# Altium PCB PCB1_ASCII.pcbdoc (part 2 of 2)
Units mm, origin at the board's own origin, x right, y up, seen from the top; angles counter-clockwise.
Board outline 100 x 24 mm, 4 copper layers (Top Layer 1, GND, VCC, Bottom Layer 1), stack 0.567 mm thick; 90 components, 59 nets, 339 pads, 337 vias.
Unrouted connection lines stored in the file: 82.
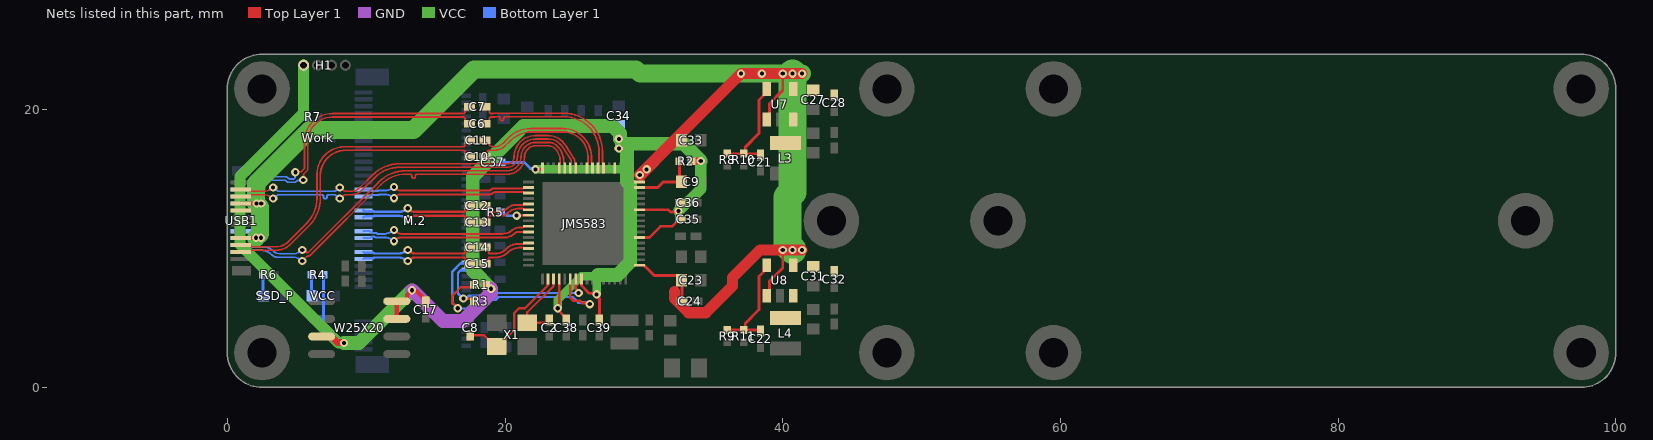
[diagram p4: the nets of this part, all layers, seen from the top]

## Via types
v1: diameter 0.6, hole 0.3, Top Layer 1 to Bottom Layer 1, 337 vias

## Nets (pads, with @x,y where several pads share a name; then routed paths per layer and width w, separated by ;. In a path a pad name is that pad's centre, name@x,y a point inside that pad or via, vN(x,y) a via of type N, cw(c..) or ccw(c..) an arc to the next point about the centre after c; other vN are vias at no path point) (continued)
N_P0_TX_N: C14.2 M.2.47 | length 8.1
  Top Layer 1 w0.172: v1(13,9.9) cw(c13,9.753) 13.104,9.857 13.188,9.773 ccw(c13.494,10.08) 13.494,9.646 17,9.646 ccw(c17,9.818) 17.122,9.697 ccw(c17,9.818) 17.172,9.818 17.172,9.832 cw(c17.377,9.832) 17.232,9.976 17.287,10.03 cw(c17.455,9.862) C14.2@17.455,10.1
  Bottom Layer 1 w0.172: M.2.47@9.8,9.75 ccw(c9.954,9.904) 9.954,9.686 10.501,9.686 cw(c10.501,9.618) 10.549,9.666 ccw(c10.597,9.714) 10.597,9.646 12.387,9.646 ccw(c12.387,10.366) 12.896,9.857 cw(c13,9.753) v1(13,9.9)
N_P0_TX_P: C15.2 M.2.49 | length 8.1
  Top Layer 1 w0.172: v1(13,9.1) ccw(c13,9.247) 13.104,9.143 13.188,9.227 cw(c13.494,8.92) 13.494,9.354 17,9.354 cw(c17,9.182) 17.122,9.303 cw(c17,9.182) 17.172,9.182 17.172,9.168 ccw(c17.377,9.168) 17.232,9.024 17.287,8.97 ccw(c17.455,9.138) C15.2@17.455,8.9
  Bottom Layer 1 w0.172: M.2.49@9.8,9.25 cw(c9.954,9.096) 9.954,9.314 10.501,9.314 ccw(c10.501,9.382) 10.549,9.334 cw(c10.597,9.286) 10.597,9.354 12.387,9.354 cw(c12.387,8.634) 12.896,9.143 ccw(c13,9.247) v1(13,9.1)
N_P1_TX_N: C12.2 M.2.35 | length 8.1
  Top Layer 1 w0.172: v1(13,12.9) cw(c13,12.753) 13.104,12.857 13.188,12.773 ccw(c13.494,13.08) 13.494,12.646 17,12.646 ccw(c17,12.818) 17.122,12.697 ccw(c17,12.818) 17.172,12.818 17.172,12.832 cw(c17.377,12.832) 17.232,12.976 17.287,13.03 cw(c17.455,12.862) C12.2@17.455,13.1
  Bottom Layer 1 w0.172: M.2.35@9.8,12.75 ccw(c9.954,12.904) 9.954,12.686 10.501,12.686 cw(c10.501,12.618) 10.549,12.666 ccw(c10.597,12.714) 10.597,12.646 12.387,12.646 ccw(c12.387,13.366) 12.896,12.857 cw(c13,12.753) v1(13,12.9)
N_P1_TX_P: C13.2 M.2.37 | length 8.1
  Top Layer 1 w0.172: v1(13,12.1) ccw(c13,12.247) 13.104,12.143 13.188,12.227 cw(c13.494,11.92) 13.494,12.354 17,12.354 cw(c17,12.182) 17.122,12.303 cw(c17,12.182) 17.172,12.182 17.172,12.168 ccw(c17.377,12.168) 17.232,12.024 17.287,11.97 ccw(c17.455,12.138) C13.2@17.455,11.9
  Bottom Layer 1 w0.172: M.2.37@9.8,12.25 cw(c9.954,12.096) 9.954,12.314 10.501,12.314 ccw(c10.501,12.382) 10.549,12.334 cw(c10.597,12.286) 10.597,12.354 12.387,12.354 cw(c12.387,11.634) 12.896,12.143 ccw(c13,12.247) v1(13,12.1)
NetC21_2: C21.2 R8.2 R10.1 U7.5 | length 7.8
  Top Layer 1 w0.2: R8.2@36,16.833 R10.1@37.2,16.833 ; C21.2@38.4,16.745 38.312,16.833 R10.1@37.2,16.833 ; U7.5@38.85,21.5 38.65,21.3 38.65,21.05 38.3,20.7 38.3,18.3 37.298,17.298 37.298,16.931 R10.1@37.2,16.833
NetC22_2: C22.2 R9.2 R11.1 U8.5 | length 7.8
  Top Layer 1 w0.2: R9.2@36,4.133 R11.1@37.2,4.133 ; C22.2@38.4,4.045 38.312,4.133 R11.1@37.2,4.133 ; U8.5@38.85,8.8 38.65,8.6 38.65,8.35 38.3,8 38.3,5.6 37.298,4.598 37.298,4.231 R11.1@37.2,4.133
NetL3_2: L3.2 U7.3
NetL4_2: L4.2 U8.3
NetR4_2: R4.2 VCC.2 | length 1.5
  Bottom Layer 1 w0.2: R4.2@6.067,8.1 6.067,6.637 VCC.2@6.101,6.603
NetR5_1: JMS583.39 R5.1 | length 2
  Top Layer 1 w0.2: v1(20.838,12.368) 21.269,12.399 cw(c21.283,12.2) 21.283,12.4 JMS583.39@21.7,12.4
  Bottom Layer 1 w0.2: R5.1@19.733,12.6 ccw(c20.292,13.159) 20.292,12.368 v1(20.838,12.368)
NetR6_2: R6.2 SSD_P.2 | length 1.5
  Bottom Layer 1 w0.2: R6.2@2.567,8.1 2.567,6.637 SSD_P.2@2.601,6.603
NetR7_2: R7.2 Work.1 | length 1.5
  Bottom Layer 1 w0.2: Work.1@5.698,17.996 5.716,18.014 R7.2@5.716,19.496
P0_RX_N: JMS583.41 M.2.41 | length 12.2
  Top Layer 1 w0.145: v1(12,11.333) cw(c12,11.224) 12.077,11.301 12.179,11.199 ccw(c12.502,11.522) 12.502,11.065 18.975,11.065 19.017,11.059 19.388,11.065 cw(c19.4,10.228) 19.4,11.065 19.49,11.065 19.6,11.065 19.803,11.065 19.805,11.065 ccw(c19.805,12.426) 20.299,11.158 ccw(c20.245,11.292) 20.344,11.186 20.378,11.218 cw(c21.21,10.285) 21.285,11.533 ccw(c21.285,11.648) 21.366,11.566 cw(c21.448,11.485) 21.448,11.6 JMS583.41@21.7,11.6
  Bottom Layer 1 w0.145: M.2.41@9.8,11.25 10.217,11.25 cw(c10.217,11.049) 10.359,11.191 ccw(c10.5,11.333) 10.5,11.132 10.657,11.132 cw(c10.657,11.017) 10.739,11.099 ccw(c10.82,11.18) 10.82,11.065 11.354,11.065 ccw(c11.354,11.87) 11.923,11.301 cw(c12,11.224) v1(12,11.333)
P0_RX_P: JMS583.42 M.2.43 | length 12.2
  Top Layer 1 w0.145: v1(12,10.533) ccw(c12,10.641) 12.077,10.564 12.179,10.666 cw(c12.502,10.343) 12.502,10.8 18.875,10.8 ; 18.876,10.8 ccw(c18.885,10.945) 18.879,10.8 19.007,10.795 ccw(c19.017,11.059) 19.02,10.794 19.021,10.794 19.391,10.8 cw(c19.4,10.228) 19.4,10.8 19.6,10.8 19.974,10.8 19.976,10.8 ccw(c19.976,11.824) 20.7,11.1 cw(c20.942,10.858) 20.942,11.2 JMS583.42@21.7,11.2
  Bottom Layer 1 w0.145: M.2.43@9.8,10.75 10.217,10.75 ccw(c10.217,10.951) 10.359,10.809 cw(c10.5,10.667) 10.5,10.867 10.547,10.867 cw(c10.547,10.752) 10.629,10.834 ccw(c10.71,10.915) 10.71,10.8 11.354,10.8 cw(c11.354,9.995) 11.923,10.564 ccw(c12,10.641) v1(12,10.533)
P0_TX_N: C14.1 JMS583.44 | length 3.6
  Top Layer 1 w0.145: C14.1@18.545,10.1 cw(c18.545,9.955) 18.648,10.058 18.714,9.991 cw(c18.501,9.778) 18.803,9.778 ccw(c18.948,9.778) 18.845,9.675 ccw(c18.948,9.777) 18.948,9.633 19.313,9.633 ccw(c19.313,10.66) 20.04,9.933 20.089,9.982 cw(c20.934,9.138) 20.934,10.332 21.285,10.332 ccw(c21.285,10.448) 21.366,10.366 cw(c21.448,10.285) 21.448,10.4 JMS583.44@21.7,10.4
P0_TX_P: C15.1 JMS583.45 | length 3.6
  Top Layer 1 w0.145: C15.1@18.545,8.9 ccw(c18.545,9.045) 18.648,8.942 18.714,9.009 ccw(c18.501,9.222) 18.803,9.222 cw(c18.948,9.222) 18.845,9.325 cw(c18.948,9.223) 18.948,9.367 19.368,9.367 ccw(c19.368,10.527) 20.188,9.707 20.199,9.717 cw(c21.043,8.873) 21.043,10.067 21.285,10.067 cw(c21.285,9.952) 21.366,10.034 ccw(c21.448,10.115) 21.448,10 JMS583.45@21.7,10
P1_RX_N: JMS583.34 M.2.29 | length 12.2
  Top Layer 1 w0.145: v1(12,14.433) cw(c12,14.324) 12.077,14.401 12.179,14.299 ccw(c12.502,14.622) 12.502,14.165 18.803,14.165 ccw(c18.803,14.451) 19.005,14.249 cw(c19.207,14.047) 19.207,14.332 21.285,14.332 ccw(c21.285,14.448) 21.366,14.366 cw(c21.448,14.285) 21.448,14.4 JMS583.34@21.7,14.4
  Bottom Layer 1 w0.145: M.2.29@9.8,14.25 10.217,14.25 cw(c10.217,14.049) 10.359,14.191 ccw(c10.5,14.333) 10.5,14.132 10.774,14.132 ccw(c10.774,14.188) 10.813,14.149 cw(c10.853,14.11) 10.853,14.165 11.354,14.165 ccw(c11.354,14.97) 11.923,14.401 cw(c12,14.324) v1(12,14.433)
P1_RX_P: JMS583.35 M.2.31 | length 12.2
  Top Layer 1 w0.145: v1(12,13.633) ccw(c12,13.741) 12.077,13.664 12.179,13.766 cw(c12.502,13.443) 12.502,13.9 18.913,13.9 ccw(c18.913,14.186) 19.115,13.984 cw(c19.317,13.782) 19.317,14.067 21.285,14.067 cw(c21.285,13.952) 21.366,14.034 ccw(c21.448,14.115) 21.448,14 JMS583.35@21.7,14
  Bottom Layer 1 w0.145: M.2.31@9.8,13.75 10.217,13.75 ccw(c10.217,13.951) 10.359,13.809 cw(c10.5,13.667) 10.5,13.867 10.884,13.867 ccw(c10.884,13.923) 10.923,13.884 cw(c10.962,13.845) 10.962,13.9 11.354,13.9 cw(c11.354,13.095) 11.923,13.664 ccw(c12,13.741) v1(12,13.633)
P1_TX_N: C12.1 JMS583.37 | length 3.6
  Top Layer 1 w0.145: C12.1@18.545,13.1 cw(c18.545,12.955) 18.648,13.058 18.737,12.968 cw(c18.579,12.81) 18.803,12.81 18.803,12.777 ccw(c18.948,12.777) 18.845,12.675 ccw(c18.948,12.778) 18.948,12.632 19.542,12.632 ccw(c19.542,13.486) 20.145,12.883 cw(c20.749,12.279) 20.749,13.133 21.285,13.133 ccw(c21.285,13.248) 21.366,13.166 cw(c21.448,13.085) 21.448,13.2 JMS583.37@21.7,13.2
P1_TX_P: C13.1 JMS583.38 | length 3.6
  Top Layer 1 w0.145: C13.1@18.545,11.9 ccw(c18.545,12.045) 18.648,11.942 18.737,12.032 ccw(c18.579,12.19) 18.803,12.19 18.803,12.222 cw(c18.948,12.222) 18.845,12.325 cw(c18.948,12.222) 18.948,12.367 19.795,12.367 ccw(c19.795,12.875) 20.154,12.516 20.213,12.575 cw(c20.919,11.869) 20.919,12.868 21.285,12.868 cw(c21.285,12.752) 21.366,12.834 ccw(c21.448,12.915) 21.448,12.8 JMS583.38@21.7,12.8
PCIE_CLK: JMS583.55 M.2.52 R3.1 | length 13.1
  Top Layer 1 w0.172: v1(17,6.4) 17.016,6.384 17.583,6.384 R3.1@17.767,6.2
  Top Layer 1 w0.2: JMS583.55@25.1,7.8 25.1,7.102 25.3,6.902 v1(25.3,6.8)
  Bottom Layer 1 w0.172: M.2.52@17.2,8.5 17.136,8.436 16.802,8.436 16.614,8.248 16.614,6.752 16.966,6.4 v1(17,6.4) 17.082,6.482 17.269,6.482 17.381,6.594 19.21,6.594 19.416,6.8 v1(25.3,6.8)
PCIE_RST: JMS583.54 M.2.50 R1.1 | length 20
  Top Layer 1 w0.172: v1(16.6,5.7) 16.584,5.7 16.214,6.07 16.214,6.614 16.816,7.216 17.583,7.216 R1.1@17.767,7.4
  Top Layer 1 w0.2: JMS583.54@24.7,7.8 24.7,6.467 24.934,6.233 25.402,6.233 25.559,6.077 26.023,6.077 v1(26.1,6)
  Bottom Layer 1 w0.172: M.2.50@17.2,9 17.136,8.936 16.802,8.936 16.214,8.348 16.214,6.07 16.584,5.7 v1(16.6,5.7) 16.618,5.682 17.282,5.682 17.902,6.302 19.331,6.302 19.537,6.508 24.876,6.508 25.278,6.106 25.785,6.106 25.809,6.082 26.018,6.082 v1(26.1,6)
RST: C9.2 JMS583.15 R2.2 | length 4.7
  Top Layer 1 w0.2: JMS583.15@29.7,14.4 31,14.4 31.4,14.8 C9.2@32.7,14.8 32.567,14.933 R2.2@32.567,16.3
RX1_N: JMS583.27 USB1.B10 | length 27.7
  Top Layer 1 w0.125: USB1.B10@0.975,13.75 1.485,13.75 ccw(c1.485,13.968) 1.639,13.814 cw(c1.793,13.66) 1.793,13.877 2.116,13.877 2.63,13.878 cw(c2.63,13.005) 3.247,13.622 ccw(c3.3,13.675) v1(3.3,13.6) ; v1(8.1,13.6) ccw(c8.1,13.675) 8.153,13.622 8.27,13.739 cw(c8.605,13.404) 8.605,13.878 8.896,13.878 ccw(c8.896,15.055) 9.728,14.222 10.617,15.111 cw(c12.413,13.315) 12.413,15.855 20.155,15.855 ccw(c20.155,16.6) 20.9,16.6 cw(c22.19,16.6) 22.19,17.89 23.117,17.89 cw(c23.117,17.645) 23.119,17.89 ccw(c23.12,18.012) 23.121,17.89 cw(c23.117,16.717) 23.949,17.544 cw(c22.689,16.289) 24.187,17.247 24.757,16.355 cw(c24.653,16.287) 24.778,16.287 cw(c24.653,16.287) 24.772,16.251 24.737,16.137 JMS583.27@24.7,15.8
  Bottom Layer 1 w0.125: v1(3.3,13.6) ccw(c3.3,13.675) 3.353,13.622 3.47,13.739 cw(c3.805,13.404) 3.805,13.878 6.5,13.878 6.808,13.878 cw(c6.808,13.753) 6.933,13.753 6.933,13.7 ccw(c7.055,13.7) 7.055,13.578 ccw(c7.055,13.7) 7.178,13.7 7.178,13.753 cw(c7.303,13.753) 7.303,13.878 7.595,13.878 cw(c7.595,13.404) 7.93,13.739 8.047,13.622 ccw(c8.1,13.675) v1(8.1,13.6)
RX1_P: JMS583.26 USB1.B11 | length 27.7
  Top Layer 1 w0.125: USB1.B11@0.975,14.25 1.485,14.25 cw(c1.485,14.032) 1.639,14.186 ccw(c1.793,14.34) 1.793,14.122 2.015,14.122 2.63,14.123 ccw(c2.63,14.995) 3.247,14.378 cw(c3.3,14.325) v1(3.3,14.4) ; v1(8.1,14.4) cw(c8.1,14.325) 8.153,14.378 8.27,14.261 ccw(c8.605,14.596) 8.605,14.123 8.845,14.123 ccw(c8.845,15.177) 9.591,14.431 10.444,15.284 cw(c12.413,13.315) 12.413,16.1 20.155,16.1 ccw(c20.155,16.6) 20.655,16.6 cw(c22.19,16.6) 22.19,18.135 23.117,18.135 cw(c23.117,17.645) 23.12,18.135 cw(c23.117,16.717) 24.123,17.716 cw(c22.689,16.289) 24.394,17.379 24.964,16.487 cw(c24.653,16.287) 25.023,16.287 ccw(c25.148,16.287) 25.028,16.251 25.063,16.137 JMS583.26@25.1,15.8
  Bottom Layer 1 w0.125: v1(3.3,14.4) cw(c3.3,14.325) 3.353,14.378 3.47,14.261 ccw(c3.805,14.596) 3.805,14.123 7.595,14.123 ccw(c7.595,14.596) 7.93,14.261 8.047,14.378 cw(c8.1,14.325) v1(8.1,14.4)
RX2_N: JMS583.28 USB1.A10 | length 28.4
  Top Layer 1 w0.125: v1(5.4,9.9) cw(c5.4,9.622) 5.597,9.819 5.674,9.741 ccw(c5.763,9.83) 5.763,9.705 ccw(c5.763,9.83) 5.851,9.741 10.894,14.784 cw(c12.863,12.815) 12.863,15.6 20.155,15.6 ccw(c20.155,16.6) 21.155,16.6 cw(c22.2,16.6) 22.2,17.645 23.117,17.645 cw(c23.117,16.717) 23.773,17.373 cw(c22.689,16.289) 24.222,16.289 24.222,16.232 ccw(c24.355,16.232) 24.261,16.139 cw(c24.168,16.045) 24.3,16.045 JMS583.28@24.3,15.8
  Bottom Layer 1 w0.125: USB1.A10@0.975,10.25 1.485,10.25 cw(c1.485,10.032) 1.639,10.186 ccw(c1.793,10.34) 1.793,10.123 2.636,10.123 cw(c2.636,9.269) 3.24,9.873 ccw(c3.843,10.476) 3.843,9.623 4.73,9.623 ccw(c4.73,10.495) 5.347,9.878 cw(c5.4,9.825) v1(5.4,9.9)
RX2_P: JMS583.29 USB1.A11 | length 28.5
  Top Layer 1 w0.125: v1(5.4,9.1) 5.704,9.404 cw(c5.838,9.271) 5.838,9.46 ccw(c5.838,9.648) 5.971,9.515 6.225,9.769 ; 6.226,9.769 11.067,14.611 cw(c12.863,12.815) 12.863,15.355 13.171,15.355 cw(c13.171,15.23) 13.296,15.23 13.296,15.177 ccw(c13.418,15.177) 13.418,15.055 ccw(c13.418,15.177) 13.541,15.177 13.541,15.23 cw(c13.666,15.23) 13.666,15.355 13.9,15.355 20.155,15.355 ccw(c20.155,16.6) 21.4,16.6 cw(c22.2,16.6) 22.2,17.4 23.117,17.4 cw(c23.117,16.717) 23.6,17.2 cw(c22.689,16.289) 23.977,16.289 23.977,16.232 cw(c23.845,16.232) 23.939,16.139 ccw(c24.032,16.045) 23.9,16.045 JMS583.29@23.9,15.8
  Bottom Layer 1 w0.125: USB1.A11@0.975,9.75 1.485,9.75 ccw(c1.485,9.968) 1.639,9.814 cw(c1.793,9.66) 1.793,9.878 2.383,9.878 cw(c2.383,8.658) 3.245,9.52 ccw(c3.59,9.865) 3.59,9.377 4.73,9.377 cw(c4.73,8.505) 5.347,9.122 ccw(c5.4,9.175) v1(5.4,9.1)
SBU1: USB1.A8
SBU2: USB1.B8
TX1_N: C6.2 JMS583.22 | length 11.5
  Top Layer 1 w0.125: C6.2@18.545,19 ccw(c18.545,19.302) C6.2@18.758,19.088 ; C6.2@18.759,19.088 18.775,19.105 ccw(c18.528,19.352) 18.878,19.352 cw(c19.003,19.352) 18.914,19.441 cw(c19.003,19.353) 19.003,19.477 19.22,19.477 ccw(c19.22,19.516) 19.247,19.489 cw(c19.275,19.462) 19.275,19.5 19.528,19.5 cw(c19.528,19.375) 19.653,19.375 19.653,19.323 ccw(c19.775,19.323) 19.775,19.2 ccw(c19.775,19.323) 19.898,19.323 19.898,19.375 cw(c20.023,19.375) 20.023,19.5 20.5,19.5 24.238,19.5 cw(c24.238,16.96) 26.778,16.96 26.778,16.232 cw(c26.645,16.232) 26.739,16.139 ccw(c26.832,16.045) 26.7,16.045 JMS583.22@26.7,15.8
TX1_P: C7.2 JMS583.21 | length 11.5
  Top Layer 1 w0.125: C7.2@18.545,20.2 cw(c18.545,19.898) 18.758,20.112 18.775,20.095 cw(c18.528,19.848) 18.878,19.848 ccw(c19.003,19.848) 18.914,19.759 ccw(c19.003,19.847) 19.003,19.723 19.119,19.723 ccw(c19.119,19.761) 19.146,19.734 cw(c19.173,19.707) 19.173,19.745 24.238,19.745 cw(c24.238,16.96) 27.023,16.96 27.023,16.232 ccw(c27.155,16.232) 27.061,16.139 cw(c26.968,16.045) 27.1,16.045 JMS583.21@27.1,15.8
TX2_N: C11.2 JMS583.23 | length 10.3
  Top Layer 1 w0.125: C11.2@18.545,17.8 18.886,17.459 ccw(c19.21,17.783) 19.21,17.325 ccw(c19.21,18.252) 19.865,17.596 20.254,17.985 cw(c21.847,16.391) 21.847,18.645 24.177,18.645 cw(c24.177,16.6) 26.222,16.6 26.222,16.232 ccw(c26.355,16.232) 26.261,16.139 cw(c26.168,16.045) 26.3,16.045 JMS583.23@26.3,15.8
TX2_P: C10.2 JMS583.24 | length 10
  Top Layer 1 w0.125: C10.2@18.545,16.616 18.637,16.808 18.637,16.837 cw(c18.88,16.837) 18.88,17.08 19.076,17.08 19.261,17.08 ccw(c19.261,18.129) 20.003,17.387 20.355,17.74 cw(c21.949,16.146) 21.949,18.4 24.177,18.4 cw(c24.177,16.6) 25.977,16.6 25.977,16.232 cw(c25.845,16.232) 25.939,16.139 ccw(c26.032,16.045) 25.9,16.045 JMS583.24@25.9,15.8
U_TX1_N: C6.1 USB1.A3 | length 21.2
  Top Layer 1 w0.125: v1(5.466,14.934) 5.488,14.956 5.488,15.349 5.8,15.661 5.8,17.7 cw(c7.578,17.7) 7.578,19.477 16.997,19.477 cw(c16.997,19.352) 17.086,19.441 cw(c16.997,19.352) 17.122,19.352 17.122,19.306 ccw(c17.36,19.306) 17.192,19.138 C6.1@17.241,19.088 ; C6.1@17.242,19.088 ccw(c17.455,19.302) C6.1@17.455,19
  Bottom Layer 1 w0.125: USB1.A3@0.975,13.75 1.485,13.75 ccw(c1.485,13.968) 1.639,13.814 cw(c1.793,13.66) 1.793,13.877 1.823,13.877 cw(c1.823,13.839) 1.851,13.866 ccw(c1.878,13.893) 1.878,13.855 2.2,13.855 ccw(c2.2,14.355) 2.7,14.355 2.7,14.6 cw(c3.027,14.6) 3.027,14.927 4.067,14.927 cw(c4.067,14.655) 4.259,14.847 ccw(c4.452,15.039) 4.452,14.767 4.804,14.767 ccw(c4.804,15.015) 4.979,14.84 cw(c5.154,14.665) 5.154,14.912 5.413,14.912 ccw(c5.413,14.987) v1(5.466,14.934)
U_TX1_P: C7.1 USB1.A2 | length 21.2
  Top Layer 1 w0.125: v1(4.9,15.5) 4.922,15.522 5.314,15.522 5.555,15.763 5.555,17.7 cw(c7.578,17.7) 7.578,19.723 16.997,19.723 ccw(c16.997,19.848) 17.086,19.759 ccw(c16.997,19.848) 17.122,19.848 17.122,19.894 cw(c17.36,19.894) 17.192,20.062 C7.1@17.241,20.112 ; C7.1@17.242,20.112 cw(c17.455,19.898) C7.1@17.455,20.2
  Bottom Layer 1 w0.125: USB1.A2@0.975,14.25 1.485,14.25 cw(c1.485,14.032) 1.639,14.186 ccw(c1.793,14.34) 1.793,14.122 1.925,14.122 cw(c1.925,14.084) 1.952,14.111 ccw(c1.979,14.138) 1.979,14.1 2.2,14.1 ccw(c2.2,14.355) 2.455,14.355 2.455,14.6 2.455,14.701 cw(c2.925,14.701) 2.925,15.172 4.169,15.172 cw(c4.169,14.9) 4.361,15.092 ccw(c4.553,15.284) 4.553,15.012 4.753,15.012 ccw(c4.753,15.138) 4.842,15.049 ccw(c4.753,15.137) 4.878,15.137 4.878,15.447 cw(c4.953,15.447) v1(4.9,15.5)
U_TX2_N: C11.1 USB1.B3 | length 21.6
  Top Layer 1 w0.125: USB1.B3@0.975,10.25 1.485,10.25 cw(c1.485,10.032) 1.639,10.186 ccw(c1.793,10.34) 1.793,10.123 3.489,10.123 ccw(c3.489,11.411) 4.4,10.5 5.711,11.811 ccw(c3.915,13.607) 6.455,13.607 6.455,15.347 cw(c8.431,15.347) 8.431,17.323 16.997,17.323 ccw(c16.997,17.448) 17.086,17.359 ccw(c16.997,17.448) 17.122,17.448 17.122,17.494 cw(c17.36,17.494) 17.192,17.662 C11.1@17.241,17.712 ; C11.1@17.242,17.712 cw(c17.455,17.498) C11.1@17.455,17.8
U_TX2_P: C10.1 USB1.B2 | length 21.5
  Top Layer 1 w0.125: USB1.B2@0.975,9.75 1.485,9.75 ccw(c1.485,9.968) 1.639,9.814 cw(c1.793,9.66) 1.793,9.878 3.489,9.878 ccw(c3.489,11.411) 4.573,10.327 5.884,11.638 ccw(c3.915,13.607) 6.7,13.607 6.7,15.245 cw(c8.532,15.245) 8.532,17.077 16.997,17.077 cw(c16.997,16.952) 17.086,17.041 cw(c16.997,16.952) 17.122,16.952 17.122,16.906 ccw(c17.36,16.906) 17.192,16.738 C10.1@17.241,16.688 ; C10.1@17.242,16.688 ccw(c17.455,16.902) C10.1@17.455,16.6
VCC: C17.2 C34.2 C35.2 C36.2 C37.2 C38.2 C39.2 H1.1 JMS583.6 JMS583.11 JMS583.19 JMS583.32 JMS583.52 JMS583.56 R1.2 R2.1 R4.1 W25X20.3 W25X20.7 W25X20.8 | length 128.4
  Top Layer 1 w0.2: v1(22.2,15.7) 22.7,15.7 JMS583.32@22.7,15.8 ; JMS583.52@23.9,7.8 23.9,5.908 23.8,5.808 v1(23.8,5.7) 23.877,5.623 23.877,5.494 24.4,4.97 C38.2@24.4,4.845 ; JMS583.56@25.5,7.8 25.5,7.346 26.07,6.777 26.523,6.777 v1(26.6,6.7) 26.6,6.592 26.8,6.392 C39.2@26.8,4.845 ; JMS583.6@29.7,10.8 30.395,10.8 31.195,11.6 32.03,11.6 32.53,12.1 32.5,12.13 v1(32.5,12.7) ; JMS583.11@29.7,12.8 31.737,12.8 31.913,12.623 32.423,12.623 v1(32.5,12.7) ; C36.2@32.655,13.3 32.5,13.145 v1(32.5,12.7)
  Top Layer 1 w0.3: W25X20.7@12.205,4.935 W25X20.8@12.205,6.205 12.823,6.205 12.947,6.329 12.947,6.647 v1(13.3,7) 13.357,6.943 13.628,6.943 14.3,6.27 C17.2@14.3,6.145
  Top Layer 1 w0.5: W25X20.3@6.795,3.665 7.504,3.665 7.95,3.219 8.381,3.219 v1(8.4,3.2) ; R2.1@33.433,16.3 v1(34.1,16.3)
  GND w1: v1(13.3,7) 15.52,4.78 16.981,4.78 19,6.799 v1(19,7.1)
  VCC w0.6: v1(22.2,15.7) 28.8,15.7 28.8,17.3 28.78,17.32 28.55,17.55 v1(28.2,17.9) ; v1(23.8,5.7) 23.8,6.318 25.482,8 26.6,8 ; v1(26.6,6.7) 26.6,8 ; 26.7,8.1 26.6,8 ; v1(28.2,17.2) 28.22,17.22 28.22,17.55
  VCC w0.8: H1.1@5.5,23.2 5.5,19.768 0.905,15.173 0.905,10.29 7.995,3.2 v1(8.4,3.2) ; v1(32.5,12.7) 34.1,14.3 v1(34.1,16.3)
  VCC w1: v1(8.4,3.2) 9.5,3.2 v1(13.3,7) ; v1(19,7.1) 17.68,8.42 17.68,15.196 21.322,18.839 27.742,18.839 28.281,18.3 v1@28.281,17.9 ; 26.7,8.1 28.101,8.1 29.02,9.019 29.02,14.581 28.78,14.821 28.78,17.32 ; 28.55,17.55 32.85,17.55 v1(34.1,16.3)
  Bottom Layer 1 w0.2: R4.1@6.933,8.1 6.933,4.667 v1(8.4,3.2) ; C37.2@19.645,16.2 21.4,16.2 21.826,15.774 22.126,15.774 v1(22.2,15.7)
  Bottom Layer 1 w0.3: C34.2@28.175,18.875 28.175,17.925 ccw(c28.2,17.925) v1(28.2,17.9)
VDDREG: C23.2 C24.2 C27.2 C28.2 C31.2 C32.2 C33.2 JMS583.1 JMS583.16 U7.1 U7.4 U8.1 U8.4 USB1.A4 USB1.A9 USB1.B4 USB1.B9 | length 109.7
  Top Layer 1 w0.2: JMS583.1@29.7,8.8 30,8.8 30.75,8.05 32.4,8.05 32.7,7.75 C23.2@32.7,7.7 32.755,7.645 C24.2@32.755,6.2 ; JMS583.16@29.7,14.8 32.35,17.45 32.4,17.45 32.7,17.75 C33.2@32.7,17.8 ; U8.1@38.85,6.6 39.05,6.8 39.05,7.65 40,8.6 v1(40,9.9) ; U7.1@38.85,19.3 39.05,19.5 39.05,20.45 40,21.4 v1(40,22.6)
  Top Layer 1 w0.3: USB1.B4@0.975,10.75 2.4,10.75 v1(2.425,10.775) ; USB1.B9@0.975,13.25 v1(2.45,13.25)
  Top Layer 1 w0.8: v1(29.7,15.3) v1(37,22.6) v1(40,22.6) v1(40.7,22.6) v1(41.4,22.6) ; 32.2,6.9 32.2,6.402 33.222,5.38 34.468,5.38 36.395,7.307 36.395,7.923 38.372,9.9 v1(40,9.9) v1(40.7,9.9) v1(41.4,9.9)
  VCC w1.3: v1(2.075,10.775) 2.35,11.05 2.35,13 v1(2.1,13.25) ; v1@2.075,13.25 2.075,14.688 5.926,18.539 13.408,18.539 17.769,22.9 29.434,22.9 29.734,22.6 v1(40,22.6) v1(40.7,22.6) v1(41.4,22.6)
  VCC w2: v1(40.7,9.9) 40.353,10.247 40.353,13.703 40.7,14.05 v1(40.7,22.6)
  Bottom Layer 1 w0.3: USB1.A9@0.975,10.75 2.4,10.75 v1(2.425,10.775) ; USB1.A4@0.975,13.25 v1(2.45,13.25)
  other v1: 30.2,15.7 38.5,22.6
XIN: C8.2 JMS583.50 X1.1 | length 8.9
  Top Layer 1 w0.172: C8.2@17.5,3.755 18.495,3.755 19.3,2.95 X1.1@19.4,2.95 19.5,2.95 20.664,4.114 20.664,5.348 21.016,5.7 21.434,5.7 23.086,7.352 23.086,7.786 JMS583.50@23.1,7.8
XOUT: C2.2 JMS583.51 X1.3 | length 5.6
  Top Layer 1 w0.172: C2.2@23.2,4.845 23.2,4.834 23.016,4.65 21.7,4.65 X1.3@21.6,4.65 21.607,4.657 21.607,5.407 23.49,7.29 23.49,7.79 JMS583.51@23.5,7.8
pads on no net: JMS583.9 JMS583.10 JMS583.12 JMS583.57 JMS583.58 JMS583.59 M.2.5 M.2.6 M.2.7 M.2.8 M.2.10 M.2.11 M.2.13 M.2.17 M.2.19 M.2.20 M.2.22 M.2.23 M.2.24 M.2.25 M.2.26 M.2.28 M.2.30 M.2.32 M.2.34 M.2.36 M.2.38 M.2.40 M.2.42 M.2.44 M.2.46 M.2.48 M.2.54 M.2.56 M.2.58 M.2.67 M.2.68 M.2.69

## Polygon pours and split planes (outlines as drawn)
GND on Bottom Layer 1 "GND_L04_P005" (solid, remove dead copper, pour order 5): 2.497,0 cw(c2.497,2.5) -0.003,2.5 -0.003,21.5 cw(c2.497,21.5) 2.497,24 97.497,24 cw(c97.497,21.5) 99.997,21.5 99.997,2.5 cw(c97.497,2.5) 97.497,0
GND on VCC "GND_L03_P004" (solid, remove dead copper, pour order 4): 2.497,0 cw(c2.497,2.5) -0.003,2.5 -0.003,21.5 cw(c2.497,21.5) 2.497,24 97.497,24 cw(c97.497,21.5) 99.997,21.5 99.997,2.5 cw(c97.497,2.5) 97.497,0
GND on GND "GND_L02_P003" (solid, remove dead copper, pour order 3): 2.497,0 cw(c2.497,2.5) -0.003,2.5 -0.003,21.5 cw(c2.497,21.5) 2.497,24 97.497,24 cw(c97.497,21.5) 99.997,21.5 99.997,2.5 cw(c97.497,2.5) 97.497,0
GND on Top Layer 1 "GND_L01_P002" (solid, remove dead copper, pour order 2): 2.497,0 cw(c2.497,2.5) -0.003,2.5 -0.003,21.5 cw(c2.497,21.5) 2.497,24 97.497,24 cw(c97.497,21.5) 99.997,21.5 99.997,2.5 cw(c97.497,2.5) 97.497,0

## Other copper
Top Layer 1:
  region net GND: 0.35,9.25 1.65,9.25 1.8,9.1 1.8,6.5 1.5,6.2 0.5,6.2 0.2,6.5 0.2,9.1
  region net GND: 0.35,14.75 0.2,14.9 0.2,17.6 0.5,17.9 1.6,17.9 1.8,17.7 1.8,14.9 1.65,14.75
  region net M.2_3V3: 32.6,2.1 29.2,2.1 29.1,2 29.1,0.8 29.2,0.7 32.6,0.7
  region net VDDREG: 44,20.6 43.1,20.6 42.7,21 40.3,21 39.6,21.7 39.6,22.7 39.9,23 41.6,23 43.1,21.5 44,21.5
  region net VDDREG: 44,7.9 43.1,7.9 42.7,8.3 40.3,8.3 39.6,9 39.6,10 39.9,10.3 41.6,10.3 43.1,8.8 44,8.8
  region net AVDDL: 44,17.7 43.4,17.7 43,17.3 41.8,17.3 41.8,16.6 41.1,15.9 39.1,15.9 38.9,16.1 37.7,16.1 37.5,16.3 36.9,16.3 36.9,14.1 37.1,13.9 38.2,13.9 38.9,14.6 41.7,14.6 44,16.9
  region net GND: 44,17.9 41.7,17.9 41.7,19.6 41.3,20 40.3,20 40.1,19.8 40.1,18.8 39.5,18.8 39.5,20.4 39.8,20.7 42.6,20.7 42.9,20.4 44,20.4
  region net NetL3_2: 41.1,19.8 41.1,18.3 41.3,18.1 41.3,17.1 39.1,17.1 39.1,18.1 39.7,18.1 40.5,18.9 40.5,19.8
  region net GND: 44,5.2 41.7,5.2 41.7,6.9 41.3,7.3 40.3,7.3 40.1,7.1 40.1,6.1 39.5,6.1 39.5,7.7 39.8,8 42.6,8 42.9,7.7 44,7.7
  region net NetL4_2: 41.1,7.1 41.1,5.7 41.3,5.5 41.3,4.5 39.1,4.5 39.1,5.5 39.8,5.5 40.5,6.2 40.5,7.1
  region net 3V3: 33.4,2.1 36,2.1 37,3.1 37.2,3.267 37.167,3.3 41.3,3.3 41.8,3.8 41.8,4.6 43.1,4.6 43.4,4.9 44,4.9 44,2.6 42.1,0.7 33.4,0.7
  region net AVDDL: 27.6,3.6 29.7,3.6 30.2,4.1 30.7,4.1 31,3.8 32,3.8 32.3,3.5 32.3,3.4 31.2,2.3 28.6,2.3 28,2.9
  region net VDDREG: 29.3,14.7 30.1,14.7 30.6,15.3 30.6,16.1 29.9,16.1 29.3,15.5
  region net VCC: 27.752,15.4 27.854,18.168 27.893,18.207 28.6,18.207 28.6,17.1 28,16.5 28,15.4
  region net LXO: 28.6,8.2 28.6,7.2 28.3,6.9 28.3,5.6 27.7,5 27.7,4.4 29.5,4.4 29.6,4.5 29.6,7.6 29,8.2
  region net VDDREG: 29.3,8.9 29.4,8.8 30,8.8 30.8,8 33.1,8 33.1,6.1 33,6 31.9,6 31.2,6.7 31,6.7 29.3,8.4
VCC:
  rectangle net VCC: 27.9,16.9 28.6,18.2
  region net M.2_3V3: 20.1,0.3 20.6,0.8 20.6,1.3 18.8,3.1 18.5,3.1 16.1,5.5 16.1,16.7 16.8,17.4 16.8,19.1 15.1,19.1 14.4,18.4 14.4,4.1 16.8,1.7 16.8,0.8 17.3,0.3
  region net M.2_3V3: 31.2,2.2 16.8,2.2 16.8,0.8 17.3,0.3 30.9,0.3 31.5,0.9 31.5,1.9
  region net M.2_3V3: 20.4,21.8 20.1,22.1 18.1,22.1 15,19 15,17.4 15.3,17.1 16.5,17.1 16.8,17.4 16.8,18 20.4,21.6
Bottom Layer 1:
  region net GND: 0.35,9.25 1.65,9.25 1.8,9.1 1.8,6.5 1.5,6.2 0.5,6.2 0.2,6.5 0.2,9.1
  region net GND: 0.35,14.75 0.2,14.9 0.2,17.6 0.5,17.9 1.6,17.9 1.8,17.7 1.8,14.9 1.65,14.75
  region net M.2_3V3: 20.5,3.3 19.2,3.3 18.8,3.7 18.1,3.7 17.643,4.157 16.8,4.157 16.8,0.8 17.3,0.3 20.3,0.3 20.5,0.5 20.5,2.5
  region net M.2_3V3: 17.6,18.7 17.6,16.8 16.8,16.8 16.1,17.5 15.5,17.5 15.3,17.7 15.3,18.7 15.5,18.9 16.5,18.9 16.7,18.7
  region net M.2_3V3: 16.8,20.3 16.8,21 17.9,22.1 20.1,22.1 20.4,21.8 20.4,21.5 20.4,20.3 17.5,20.3

## Silkscreen, mask and mechanical layers (free items; w line width, h text height)
Top Silkscreen Layer:
  lines w0.1: 47.5,0 ccw(c47.5,2.5) 50,2.5 50,21.5 ccw(c47.5,21.5) 47.5,24 ; 59.5,0 ccw(c59.5,2.5) 62,2.5 62,21.5 ccw(c59.5,21.5) 59.5,24
Bottom Silkscreen Layer:
  lines w0.1: 47.497,0 ccw(c47.497,2.5) 49.997,2.5 49.997,21.5 ccw(c47.497,21.5) 47.497,24 ; 59.497,0 ccw(c59.497,2.5) 61.997,2.5 61.997,21.5 ccw(c59.497,21.5) 59.497,24
Mechanical Layer:
  drawing of 146 lines, arcs and shapes, not listed
  text "100" at 47.364,50.568 h2.5
  text "95" at 48.202,45.463 h2.5
  text "80" at 51.715,36.273 h2.5
  text "42" at 32.675,31.861 h2.5
  text "R2,5" at 101.837,29.091 h2.5 r38.14
  text "13,5" at 3.615,27.513 h2.5
  text "30" at 26.718,27.288 h2.5
  text "19" at 100.874,10.75 h2.5 r90
  text "24" at 106.203,10.75 h2.5 r90
  text "45" at 23.153,-3.367 h2.5
  text "∅4" at 86.806,-5.124 h2.5 r47.48
  text "∅2,05" at 102.136,-5.54 h2.5 r312.82
  text "57" at 29.212,-7.363 h2.5
  text "50" at 23.216,-11.082 h2.5
  text "62" at 29.218,-14.987 h2.5
Mechanical 2:
  circle w0.006: c97.5,21.5 r0.003
  circle w0.006: c99.466,23.044 r0.003
  circle w0.006: c62,-15.638 r0.003
  circle w0.006: c62,2.5 r0.003
  circle w0.006: c0,2.5 r0.003
  circle w0.006: c50,-11.733 r0.003
  circle w0.006: c50,2.5 r0.003
  circle w0.006: c0,2.5 r0.003
  circle w0.006: c59.5,2.5 r0.003
  circle w0.006: c2.5,2.5 r0.003
  circle w0.006: c47.5,2.5 r0.003
  circle w0.006: c2.5,2.5 r0.003
  circle w0.006: c13.5,21.5 r0.003
  circle w0.006: c0,21.5 r0.003
  circle w0.006: c98.852,3.974 r0.003
  circle w0.006: c96.148,1.026 r0.003
  circle w0.006: c96.803,3.252 r0.003
  circle w0.006: c98.197,1.748 r0.003
  circle w0.006: c97.5,0 r0.003
  circle w0.006: c97.5,24 r0.003
  circle w0.006: c97.5,2.5 r0.003
  circle w0.006: c97.5,21.5 r0.003
  circle w0.006: c97.5,44.811 r0.003
  circle w0.006: c97.5,21.5 r0.003
  circle w0.006: c2.5,21.5 r0.003
  circle w0.006: c100,49.917 r0.003
  circle w0.006: c100,21.5 r0.003
  circle w0.006: c0,21.5 r0.003
  circle w0.006: c93.5,12 r0.003
  circle w0.006: c55.5,12 r0.003
  circle w0.006: c43.5,26.636 r0.003
  circle w0.006: c43.5,12 r0.003